# Altium PCB PCB3.PcbDoc
Units mm, origin at the board's own origin, x right, y up, seen from the top; angles counter-clockwise.
Board outline 52.58 x 36.07 mm, 2 copper layers (Top Layer, Bottom Layer); 11 components, 23 nets, 62 pads, 0 vias.
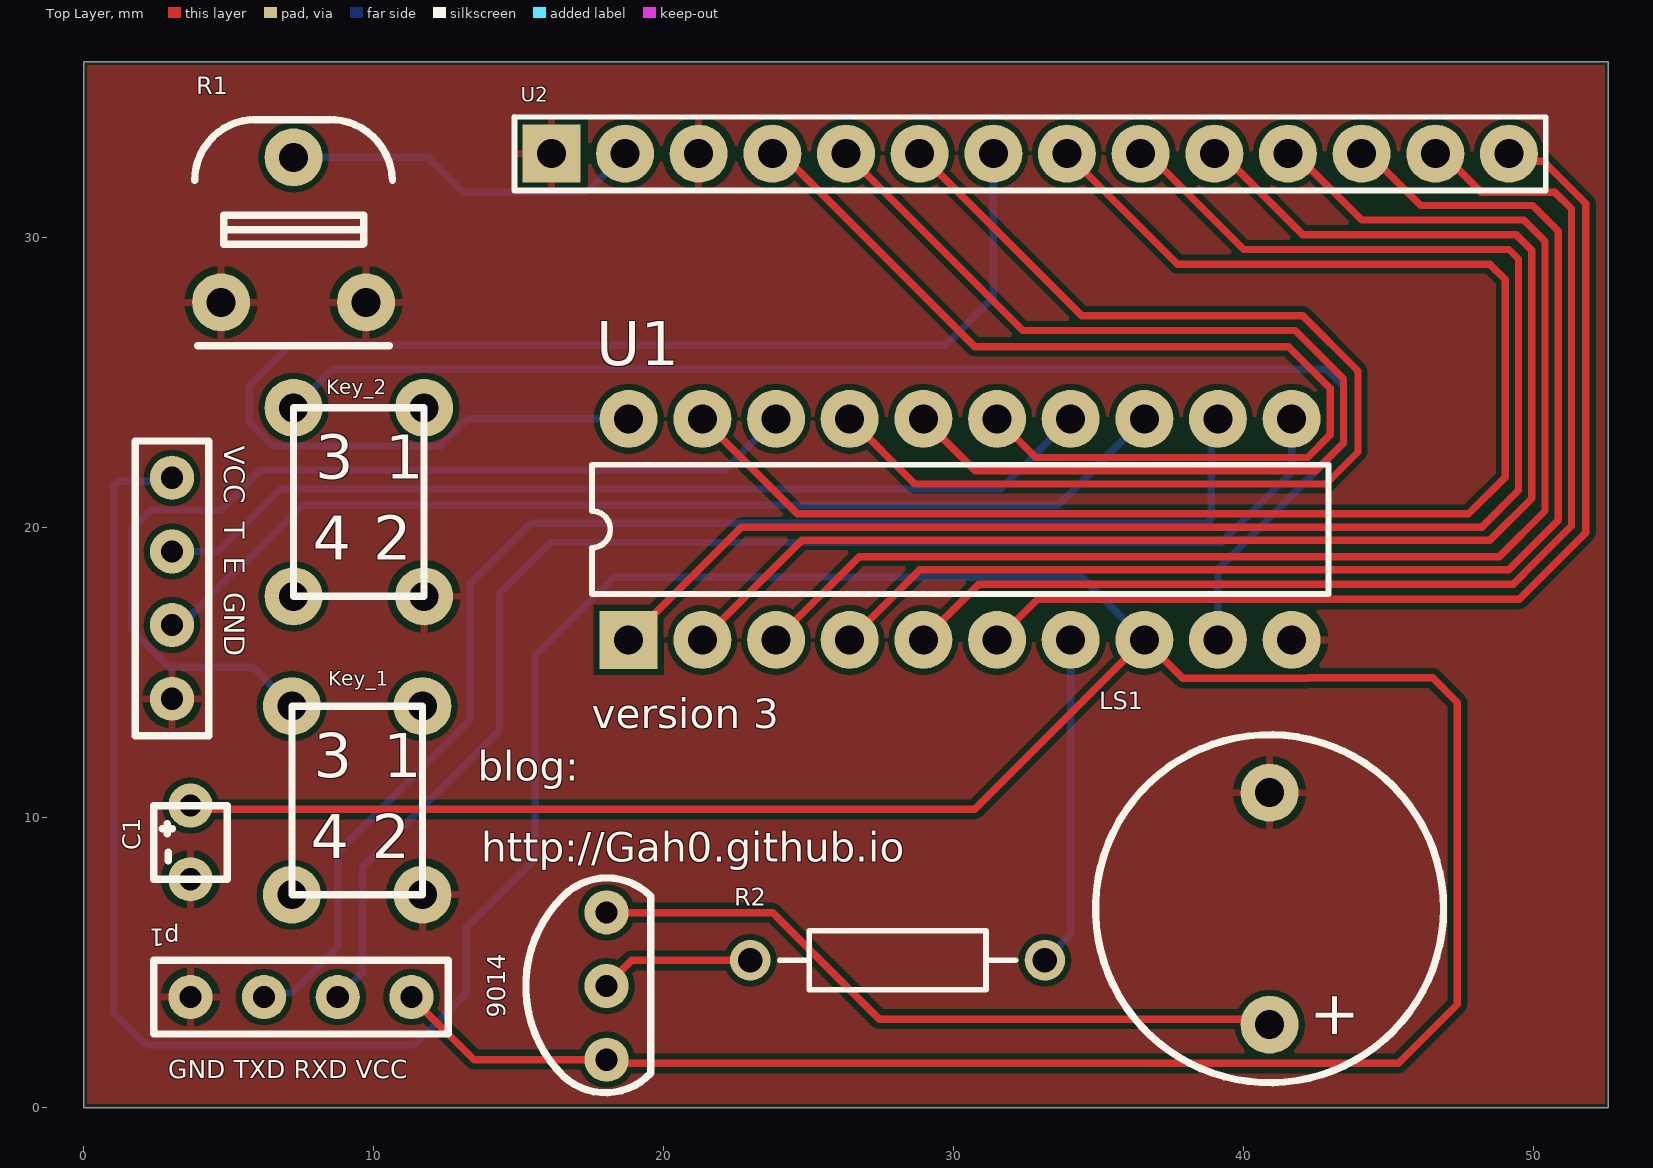
[diagram p0: Top Layer view]
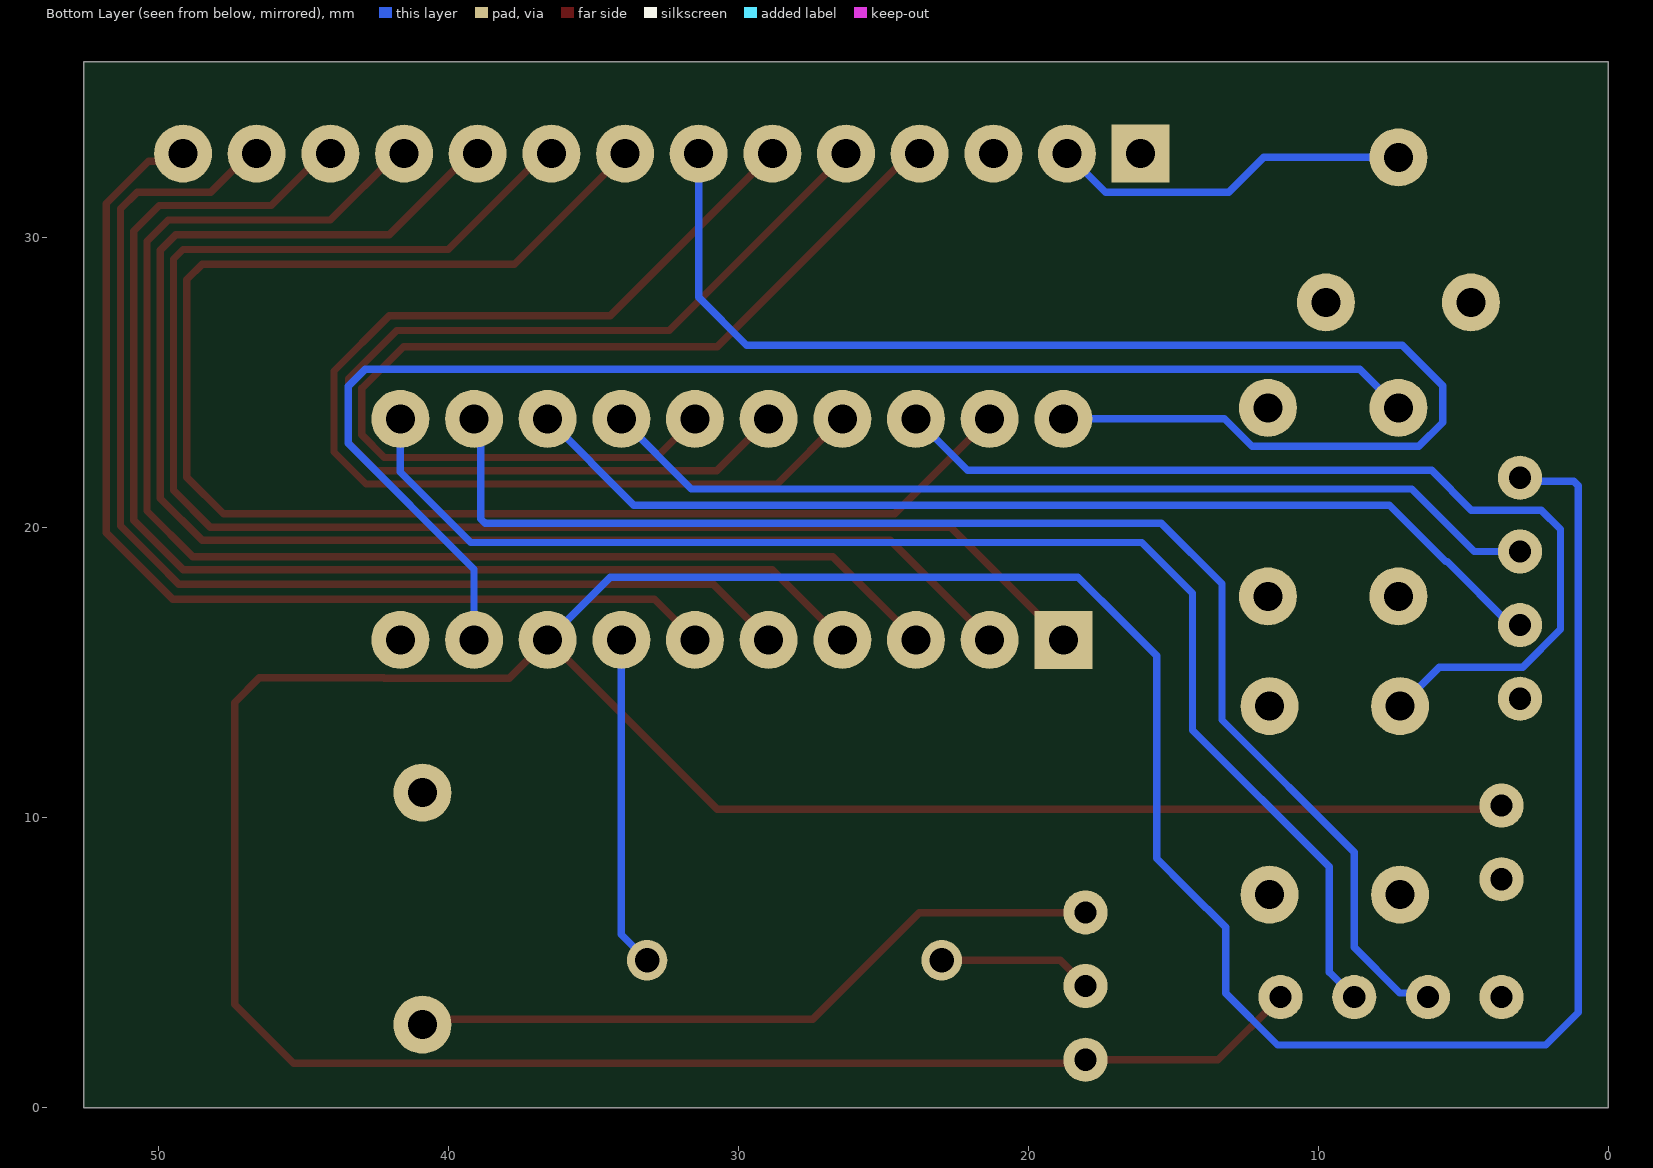
[diagram p1: Bottom Layer view, seen from below]

## Layer stack, top to bottom
Top Solder: solder mask 0.0102, Solder Resist, Dk 3.5
Top Layer: signal copper 0.0356
Dielectric 1: dielectric 0.32, FR-4, Dk 4.8
Bottom Layer: signal copper 0.0356
Bottom Solder: solder mask 0.0102, Solder Resist, Dk 3.5

## Board outline
0,0 0,36.068 52.578,36.068 52.578,0

## Design rules (kind name [scope] priority, off if disabled: settings)
Clearance [All] p1: gap=0.203 ignorepadtopadclearanceinfootprint=FALSE
PolygonConnect [All] p1: connectstyle=Relief reliefconductorwidth=0.254 reliefentries=4 polygonreliefangle="90 Angle" airgapwidth=0.254
RoomDefinition SHEET1 [InComponentClass('SHEET1')] p1: confinementstyle=ConfineIn formatcopy=TRUE lockcomponents=FALSE outline 26.162,1.524 95.504,1.524 95.504,40.132 26.162,40.132
RoutingVias [All] p1: holewidth=0.711 width=1.27 viastyle="Through Hole" minholewidth=0.711 minwidth=1.27 maxholewidth=0.711 maxwidth=1.27
SolderMaskExpansion [All] p1: expansion=0.102 istentingtop=FALSE
UnRoutedNet [All] p1: checkbadconnections=TRUE
Width [All] p1: maxlimit=0.5 minlimit=0.254 preferedwidth=0.254
29 further rules are at their usual default settings.

## Components (designator, comment, footprint, x,y, rotation, side; value= is the part's Value field where it differs from the comment)
9014 "Comment" PNP 18.034,4.191 r0 top (schematic designator Q1)
C1 "Cap" LED 3.683,7.874 r270 top value=0.1uF
Key_1 "SW-PB" BOTTOM 7.184,13.843 r0 top (schematic designator S1)
Key_2 "SW-PB" BOTTOM 7.239,24.13 r0 top (schematic designator S2)
LS1 "Speaker" SPEAKER 40.894,6.858 r90 top
p1 "POWER" POWER 3.683,3.81 r0 top
R1 "RPot" RESADJ 4.739,27.766 r0 top value=10k
R2 "Res2" AXIAL-0.4 28.067,5.08 r180 top value=220R
U1 "IAP15F2K61S2" DIP20 18.796,16.129 r90 top
U2 "LM016L" LCD1602 16.129,32.893 r90 top
"VCC  T  E  GND" "ultrasonic" SONIC 3.048,21.717 r270 top (schematic designator con4)

## Footprints (in the part's own frame and the unit in brackets; to place one, negate y for a bottom-side part, rotate by r counter-clockwise, add the part's x,y. Pads: shape width x height; smd on the part's side, far side on the other; paste and mask are expansions set on the pad)
AXIAL-0.4 [mm] "Axial Device, Thru-Hole; 2 Leads; 0.4 in Pin Spacing"
  round 1.4 hole 0.85: 1(-5.08,0) 2(5.08,0)
  silkscreen extent -4.06,-1.02 4.06,1.02
BOTTOM [mm]
  round 2 hole 1: 1(0,0) 2(4.5,-6.5) 28(4.5,0) 29(0,-6.5)
  silkscreen extent 0,-6.5 4.5,0
DIP20 [mm]
  rect 2x2 hole 1: 1(0,0)
  round 2 hole 1: 2(0,-2.54) 3(0,-5.08) 4(0,-7.62) 5(0,-10.16) 6(0,-12.7) 7(0,-15.24) 8(0,-17.78) 9(0,-20.32) 10(0,-22.86) 11(7.62,-22.86) 12(7.62,-20.32) 13(7.62,-17.78) 14(7.62,-15.24) 15(7.62,-12.7) 16(7.62,-10.16) 17(7.62,-7.62) 18(7.62,-5.08) 19(7.62,-2.54) 20(7.62,0)
  silkscreen extent 1.58,-24.13 6.04,1.27
LCD1602 [mm]
  rect 2x2 hole 1: 1(0,0)
  round 2 hole 1: 2(0,-2.54) 3(0,-5.08) 4(0,-7.62) 5(0,-10.16) 6(0,-12.7) 7(0,-15.24) 8(0,-17.78) 9(0,-20.32) 10(0,-22.86) 11(0,-25.4) 12(0,-27.94) 13(0,-30.48) 14(0,-33.02)
  silkscreen extent -1.27,-34.29 1.27,1.27
LED [mil]
  round 60 hole 30: 1(-100,0) 2(0,0)
  silkscreen extent -100,-50 0,50
PNP [mil]
  round 60 hole 30: 1(0,-100) 2(0,0) 3(0,100)
  silkscreen extent -109,-145 60,147
POWER [mil]
  round 60 hole 30: 18(0,0) 19(100,0) 20(200,0) 21(300,0)
  silkscreen extent -50,-50 350,50
RESADJ [mm]
  round 2 hole 1: 1(0,0) 2(5,0) 3(2.5,5)
  silkscreen extent -0.91,-1.5 5.91,6.3
SONIC [mil]
  round 60 hole 30: 1(0,0) 2(100,0) 3(200,0) 5(300,0)
  silkscreen extent -50,-50 350,50
SPEAKER [mm]
  round 2 hole 1: 1(-4,0) 2(4,0)
  silkscreen extent -6,-6 6,6

## Part data
9014: library part 2N3906, "PNP General Purpose Amplifier", ComponentLink1Description="Manufacturer Link", ComponentLink1URL=http://www.fairchildsemi.com/, ComponentLink2Description=Datasheet, ComponentLink2URL=http://www.fairchildsemi.com/ds/2N%2F2N3906.pdf, DatasheetVersion=1997, LatestRevisionDate=15-Jan-2003, LatestRevisionNote="PCB Footprint 'BCY-W3/D4.7' replaced", PackageDescription="TO, Flat Index; 3 In-Line, Axial Leads; Body Dia. 4.5mm; Leads 0.51 x 0.48 mm (max)", PackageReference=TO-92A, PackageVersion=Sep-1998, Published=8-Jun-2000, Publisher="Altium Limited"
C1: "Capacitor", LatestRevisionDate=17-Jul-2002, LatestRevisionNote="Re-released for DXP Platform.", PackageDescription="Radial Cap, Thru-Hole; 2 Leads; 0.3 in Pin Spacing", PackageReference=RAD-0.3, Published=8-Jun-2000, Publisher="Altium Limited"
Key_1 Key_2: "Switch", LatestRevisionDate=17-Jul-2002, LatestRevisionNote="Re-released for DXP Platform.", PackageDescription="Switch; 2 Leads", PackageReference=SPST-2, Published=24-Mar-1999, Publisher="Altium Limited"
LS1: "Loudspeaker", LatestRevisionDate=17-Jul-2002, LatestRevisionNote="Re-released for DXP Platform.", PackageReference=PIN2, Published=24-Mar-1999, Publisher="Altium Limited"
R1: "Potentiometer", LatestRevisionDate=17-Jul-2002, LatestRevisionNote="Re-released for DXP Platform.", PackageDescription="Variable Resistor, Thru-Hole; 3 Leads", PackageReference=VR5, Published=8-Jun-2000, Publisher="Altium Limited", Set Position=0.5, Sim Note="Enter the Resistance value and the set point into parameter fields."
R2: "Resistor", LatestRevisionDate=17-Jul-2002, LatestRevisionNote="Re-released for DXP Platform.", PackageDescription="Axial Device, Thru-Hole; 2 Leads; 0.4 in Pin Spacing", PackageReference=AXIAL-0.4, Published=8-Jun-2000, Publisher="Altium Limited"

## Nets (pads, with @x,y where several pads share a name; then routed paths per layer and width w, separated by ;. In a path a pad name is that pad's centre, name@x,y a point inside that pad or via, vN(x,y) a via of type N, cw(c..) or ccw(c..) an arc to the next point about the centre after c; other vN are vias at no path point)
BEEP: R2.1 U1.7 | length 11.4
  Bottom Layer w0.254: R2.1 34.036,5.969 U1.7
E: U1.17 U2.6 | length 39.9
  Top Layer w0.254: U1.17 28.661,21.504 42.84,21.504 43.942,22.606 43.942,25.4 42.037,27.305 34.417,27.305 U2.6
ECHO: "VCC  T  E  GND.3" U1.13 | length 37.2
  Top Layer w0.254: 3.291,16.88 3.048,16.637 3.392,16.637
  Bottom Layer w0.254: 3.048,16.637 3.361,16.637 5.553,18.828 5.603,18.828 7.549,20.775 33.602,20.775 U1.13
LCD0: U1.20 U2.7 | length 47
  Bottom Layer w0.254: U1.20 13.239,23.749 12.29,22.8 6.537,22.8 5.715,23.622 5.715,24.892 7.112,26.289 29.718,26.289 31.369,27.94 U2.7
LCD1: U1.19 U2.8 | length 53.3
  Top Layer w0.254: U1.19 24.613,20.472 47.756,20.472 49.022,21.739 49.022,28.553 48.492,29.083 37.719,29.083 U2.8
LCD2: U1.1 U2.9 | length 55.1
  Top Layer w0.254: U1.1 22.682,20.015 48.209,20.015 49.479,21.285 49.479,29.261 49.149,29.591 40.005,29.591 U2.9@36.703,32.893
LCD3: U1.2 U2.10 | length 51.3
  Top Layer w0.254: U1.2 24.765,19.558 48.492,19.558 49.936,21.002 49.936,29.566 49.403,30.099 42.037,30.099 U2.10@39.243,32.893
LCD4: U1.3 U2.11 | length 47.5
  Top Layer w0.254: U1.3 26.746,18.999 48.819,18.999 50.394,20.574 50.394,29.87 49.657,30.607 44.069,30.607 U2.11@41.783,32.893
LCD5: U1.4 U2.12 | length 43.7
  Top Layer w0.254: U1.4 28.829,18.542 49.137,18.542 50.851,20.255 50.851,30.226 49.971,31.106 46.11,31.106 U2.12@44.323,32.893
LCD6: U1.5 U2.13 | length 40.1
  Top Layer w0.254: U1.5 30.87,18.043 49.297,18.043 49.657,18.403 49.657,18.415 51.308,20.066 51.308,30.988 50.733,31.563 48.193,31.563 U2.13@46.863,32.893
LCD7: U1.6 U2.14 | length 36.3
  Top Layer w0.254: U1.6 32.893,17.526 49.505,17.526 51.802,19.823 51.802,31.176 50.339,32.638 49.658,32.638 U2.14@49.403,32.893
Net9014_2: 9014.2 R2.2 | length 5.3
  Top Layer w0.254: 9014.2@18.009,4.189 18.9,5.08 R2.2
Net9014_3: 9014.3 LS1.1 | length 24.5
  Top Layer w0.254: 9014.3@18.034,6.722 23.758,6.722 27.432,3.048 40.703,3.048 LS1.1
NetKey_1_1: Key_1.1 U1.18 | length 33.9
  Bottom Layer w0.254: Key_1.1 5.838,15.189 2.951,15.189 1.651,16.489 1.651,19.939 2.314,20.602 4.727,20.602 6.096,21.971 22.098,21.971 U1.18
NetKey_2_1: Key_2.1 U1.9 | length 47.6
  Bottom Layer w0.254: Key_2.1 8.569,25.46 42.866,25.46 43.456,24.87 43.456,22.906 39.116,18.566 U1.9
NetR1_3: R1.3 U2.2 | length 12.5
  Bottom Layer w0.254: R1.3 11.887,32.766 13.09,31.563 17.339,31.563 U2.2
RS: U1.15 U2.4 | length 36.6
  Top Layer w0.254: U2.4 24.079,32.893 30.734,26.238 41.546,26.238 42.986,24.798 42.986,23.198 42.207,22.419 32.826,22.419 U1.15
RW: U1.16 U2.5 | length 38.2
  Top Layer w0.254: U2.5 32.385,26.797 41.783,26.797 43.443,25.137 43.443,22.92 42.485,21.962 30.743,21.962 U1.16
RXD: p1.20 U1.11 | length 47.1
  Bottom Layer w0.254: p1.20 9.626,4.673 9.626,8.304 14.339,13.017 14.339,17.731 16.094,19.485 39.225,19.485 41.656,21.916 U1.11
S+: 9014.1 "VCC  T  E  GND.1" C1.1 p1.21 U1.8 | length 164.6
  Top Layer w0.254: C1.1 3.81,10.287 30.734,10.287 U1.8 37.906,14.799 42.207,14.799 42.224,14.816 46.525,14.816 47.371,13.97 47.371,3.556 45.339,1.524 18.161,1.524 9014.1 13.462,1.651 p1.21
  Bottom Layer w0.254: 3.048,21.717 2.927,21.596 1.189,21.596 1.04,21.448 1.04,3.28 2.162,2.159 11.412,2.159 13.198,3.945 13.198,6.213 14.501,7.516 15.575,8.59 15.575,15.575 16.715,16.715 18.288,18.288 34.417,18.288 U1.8
S-: "VCC  T  E  GND.5" C1.2 Key_1.2 Key_2.2 LS1.2 p1.18 R1.1 R1.2 U1.10 U2.1 U2.3 | length 0.2
  Bottom Layer w0.254: R1.2 R1.2@9.857,27.884
TRIG: "VCC  T  E  GND.2" U1.14 | length 33.1
  Top Layer w0.254: 2.9,19.029 3.048,19.177
  Bottom Layer w0.254: 3.048,19.177 4.629,19.177 6.785,21.333 31.62,21.333 U1.14
TXD: p1.19 U1.12 | length 47.7
  Bottom Layer w0.254: p1.19 6.365,3.952 7.189,3.952 8.763,5.526 8.763,8.806 13.323,13.366 13.323,18.057 15.413,20.147 38.729,20.147 38.878,20.296 38.878,23.511 U1.12
pads on no net: Key_1.28 Key_1.29 Key_2.28 Key_2.29

## Polygon pours and split planes (outlines as drawn)
S- on Top Layer "S-_L01_P000" (solid, pour order 0): 0.127,35.941 0.127,0.127 52.451,0.127 52.451,35.941

## Silkscreen, mask and mechanical layers (free items; w line width, h text height)
Top Overlay:
  text "version 3" at 17.526,13.081 h1.02
  text "blog:" at 13.589,11.263 h1.02
  text "http://Gah0.github.io" at 13.716,8.469 h1.02
  text "GND TXD RXD VCC" at 2.921,1.016 h0.63
Mechanical 1:
  the board outline again, w0.254

## Dimensions
0,36.068 to 0,0 on Mechanical 1
0,0 to 52.578,0 on Mechanical 1

## Text inside footprints (layer, text, board x,y; h text height)
Key_1: Top Overlay "4" at 7.838,8.597 h1.52; Top Overlay "2" at 9.938,8.597 h1.52; Top Overlay "3" at 7.938,11.397 h1.52; Top Overlay "1" at 10.338,11.397 h1.52
Key_2: Top Overlay "1" at 10.393,21.684 h1.52; Top Overlay "3" at 7.993,21.684 h1.52; Top Overlay "2" at 9.993,18.884 h1.52; Top Overlay "4" at 7.893,18.884 h1.52
LS1: Top Overlay "+" at 43.794,2.312 h1.52 r90